# EAGLE board 1nuc (EAGLE 8.5.0)

Size 77.45 x 98.73 mm. Coordinates in mm from the lower left corner, seen from the top.
Outline: 0,0 77.45,0 77.45,98.73 1.27,98.73 0,0
Copper layers (1*16): Top 0.035mm / dielectric 1.5mm / Bottom 0.035mm
Design rules "default": minimum track width 6mil, minimum drill 0.35mm, track to track 6mil, track to pad 6mil, pad to pad 6mil, via to via 6mil, smd to smd 6mil, copper to edge 40mil, drill to drill 6mil, minimum pad ring 10mil, minimum via ring 8mil, stop-mask expansion 4mil, vias tented up to drill 0mil, thermal gap 10mil

## Footprints (pad centres in the part's own frame; a part is rotated, then mirrored left to right if it is on the bottom)
C1206 = smd 1.6 x 1.8: 1 -1.4,0; 2 1.4,0
1X06 = drill 1.016 long: 1 -6.35,0; 2 -3.81,0; 3 -1.27,0; 4 1.27,0; 5 3.81,0; 6 6.35,0
1X03 = drill 1.016 long: 1 -2.54,0; 2 0,0; 3 2.54,0
2X19 = drill 1.016 octagon: 1 -22.86,-1.27; 2 -22.86,1.27; 3 -20.32,-1.27; 4 -20.32,1.27; 5 -17.78,-1.27; 6 -17.78,1.27; 7 -15.24,-1.27; 8 -15.24,1.27; 9 -12.7,-1.27; 10 -12.7,1.27; 11 -10.16,-1.27; 12 -10.16,1.27; 13 -7.62,-1.27; 14 -7.62,1.27; 15 -5.08,-1.27; 16 -5.08,1.27; 17 -2.54,-1.27; 18 -2.54,1.27; 19 0,-1.27; 20 0,1.27; 21 2.54,-1.27; 22 2.54,1.27; 23 5.08,-1.27; 24 5.08,1.27; 25 7.62,-1.27; 26 7.62,1.27; 27 10.16,-1.27; 28 10.16,1.27; 29 12.7,-1.27; 30 12.7,1.27; 31 15.24,-1.27; 32 15.24,1.27; 33 17.78,-1.27; 34 17.78,1.27; 35 20.32,-1.27; 36 20.32,1.27; 37 22.86,-1.27; 38 22.86,1.27
1X08 = drill 1.016 long: 1 -8.89,0; 2 -6.35,0; 3 -3.81,0; 4 -1.27,0; 5 1.27,0; 6 3.81,0; 7 6.35,0; 8 8.89,0
R0805 = smd 1.3 x 1.5: 1 -0.95,0; 2 0.95,0
5501 = drill 0.9 pad 1.5 square: 1A 0,3.81; 1B 0,-3.81; NC 5.08,-3.81; NO 5.08,3.81 | hole 1.1: -7.62,3.81; 7.62,-3.81
1X02 = drill 1.016 long: 1 -1.27,0; 2 1.27,0

## Placement (x,y rotation side)
C1  [C1206]  58.42,13.97 0 top
C2  [C1206]  15.24,43.18 0 top
C3  [C1206]  59.69,43.18 0 top
HC-05M  [1X06]  11.43,12.7 90 top
JP4  [1X03]  58.42,3.81 180 top
NUCLEO_L  [2X19]  9.27,72.39 270 top
NUCLEO_P  [2X19]  69.85,72.39 270 top
OLED  [1X08]  41.91,35.56 180 top
R1  4k7  [R0805]  58.42,19.05 0 top
R2  100  [R0805]  58.42,24.13 180 top
R3  4k7  [R0805]  24.13,36.83 0 top
R4  100  [R0805]  24.13,26.67 0 top
R6  4k7  [R0805]  69.85,43.18 0 top
R7  100  [R0805]  59.69,35.56 0 top
S1  5501  [5501]  72.39,17.78 180 top
S2  5501  [5501]  6.35,33.02 0 top
S3  5501  [5501]  72.39,34.29 180 top
ZASILANIE  [1X02]  74.93,5.08 90 top

## Library data of the parts
C1-C3 = rcl; SPICEPREFIX: C
HC-05M JP4 NUCLEO_L NUCLEO_P OLED ZASILANIE = pinhead
R1-R4 R6 R7 = rcl; SPICEPREFIX: R
S1-S3 = switch

## Nets
3V: NUCLEO_L.16
5V: HC-05M.1 HC-05M.2 JP4.1 NUCLEO_L.18 OLED.1 R1.2 R3.2 R6.2 ZASILANIE.1
AGND: NUCLEO_P.32
AVDD: NUCLEO_P.7
BOOTO: NUCLEO_L.7
E5V: NUCLEO_L.6
GND: HC-05M.3 JP4.3 NUCLEO_L.20 NUCLEO_L.22 OLED.2 R2.2 R4.2 R7.2 S1.NC S1.NO S2.NC S2.NO S3.NC S3.NO ZASILANIE.2
GND1: NUCLEO_L.8
GND2: NUCLEO_P.9
GND3: NUCLEO_L.19
GNDA: NUCLEO_P.20
IOREF: NUCLEO_L.12
N$1: C1.2 R2.1
N$3: C2.2 R4.1
N$4: C3.2 R7.1
NC: NUCLEO_L.9 NUCLEO_L.10 NUCLEO_L.11 NUCLEO_L.26
NCA: NUCLEO_P.10
NCB: NUCLEO_P.18
NCC: NUCLEO_P.36 NUCLEO_P.38
PA0: NUCLEO_L.28
PA1: NUCLEO_L.30
PA2: NUCLEO_P.35
PA3: NUCLEO_P.37
PA4: NUCLEO_L.32
PA5: NUCLEO_P.11
PA6: NUCLEO_P.13
PA7: NUCLEO_P.15
PA8: NUCLEO_P.23
PA9: HC-05M.5 NUCLEO_P.21
PA10: HC-05M.4 NUCLEO_P.33
PA11: NUCLEO_P.14
PA12: NUCLEO_P.12
PA13: NUCLEO_L.13
PA14: NUCLEO_L.15
PA15: NUCLEO_L.17
PB0: NUCLEO_L.34
PB1: NUCLEO_P.24
PB2: NUCLEO_P.22
PB3: NUCLEO_P.31
PB4: NUCLEO_P.27
PB5: NUCLEO_P.29
PB6: NUCLEO_P.17
PB7: NUCLEO_L.21
PB8: NUCLEO_P.3
PB9: NUCLEO_P.5
PB10: NUCLEO_P.25 OLED.5
PB12: NUCLEO_P.16
PB13: NUCLEO_P.30 OLED.6
PB14: NUCLEO_P.28 OLED.7
PB15: NUCLEO_P.26 OLED.8
PC0: C2.1 NUCLEO_L.38 R3.1 S2.1A S2.1B
PC1: NUCLEO_L.36
PC2: C1.1 NUCLEO_L.35 R1.1 S1.1A S1.1B
PC3: NUCLEO_L.37 OLED.4
PC4: NUCLEO_P.34
PC5: NUCLEO_P.6
PC6: NUCLEO_P.4
PC7: NUCLEO_P.19
PC8: NUCLEO_P.2
PC9: NUCLEO_P.1
PC10: JP4.2 NUCLEO_L.1
PC11: NUCLEO_L.2
PC12: C3.1 NUCLEO_L.3 R6.1 S3.1A S3.1B
PC13: NUCLEO_L.23
PC14: NUCLEO_L.25
PC15: NUCLEO_L.27
PD2: NUCLEO_L.4
PH0: NUCLEO_L.29
PH1: NUCLEO_L.31
RESET: NUCLEO_L.14
U5V: NUCLEO_P.8
VBAT: NUCLEO_L.33
VDD: NUCLEO_L.5
VIN: NUCLEO_L.24

## Tracks (layer width: path | path; a pad name or v marks a point on that pad's centre or on a via)
5V  (8 unrouted)
GND  (14 unrouted)
N$1  (1 unrouted)
N$3  (1 unrouted)
N$4  (1 unrouted)
NC  (3 unrouted)
NCC  (1 unrouted)
PA9  (1 unrouted)
PA10  (1 unrouted)
PB10  (1 unrouted)
PB13  (1 unrouted)
PB14  (1 unrouted)
PB15  (1 unrouted)
PC0  (4 unrouted)
PC2  (4 unrouted)
PC3  (1 unrouted)
PC10  (1 unrouted)
PC12  (4 unrouted)
(copper drawn outside any net)
  shapes: Top area x1